# EAGLE board QRD1114_lista (EAGLE 9.0.1)
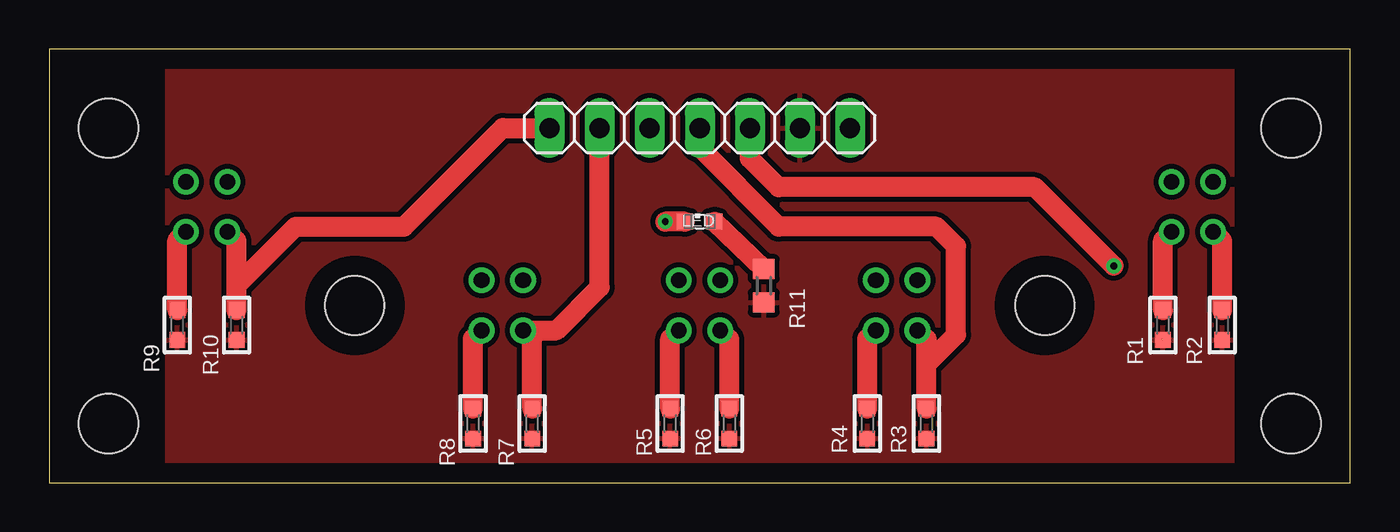
[diagram p0: board, top side]
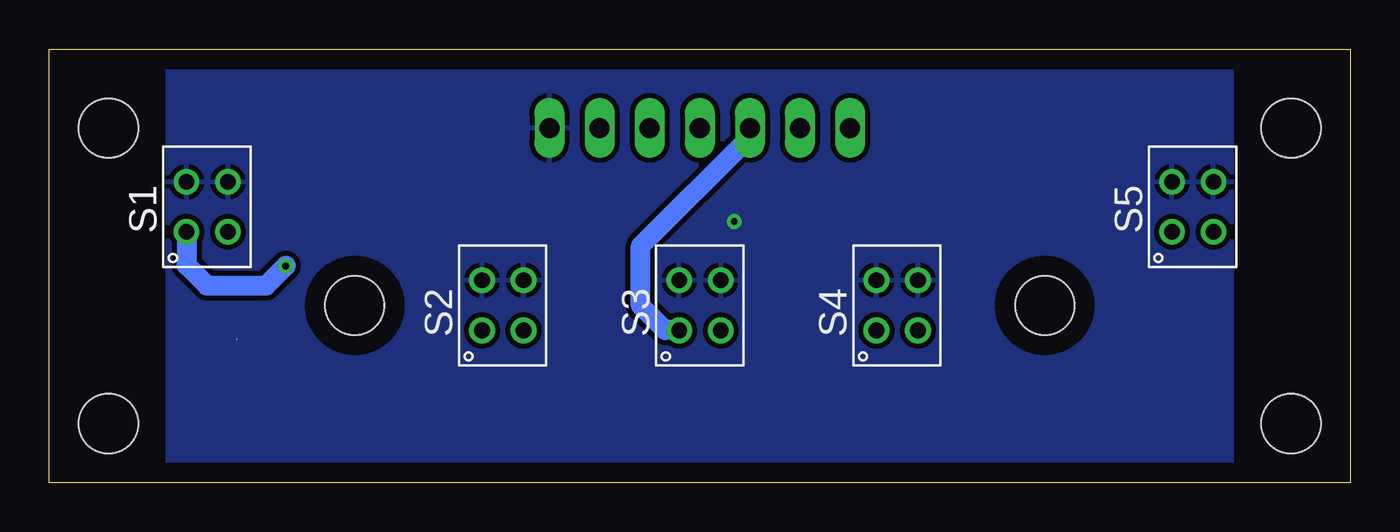
[diagram p1: board, bottom side, seen from below]

Size 66 x 22 mm. Coordinates in mm from the lower left corner, seen from the top.
Outline: 0,0 66,0 66,22 0,22 0,0
Copper layers (1*16): Top 0.035mm / dielectric 1.5mm / Bottom 0.035mm
Design rules "default": minimum track width 6mil, minimum drill 0.35mm, track to track 6mil, track to pad 6mil, pad to pad 6mil, via to via 6mil, smd to smd 6mil, copper to edge 40mil, drill to drill 6mil, minimum pad ring 10mil, minimum via ring 8mil, stop-mask expansion 4mil, vias tented up to drill 0mil, thermal gap 10mil
Net classes: 0 default: width 0.254 mm, drill 0.254 mm, clearance 0.254 mm
Holes 3 mm at 3,18 3,3 63,18 63,3 50.5,9 15.5,9

## Footprints (pad centres in the part's own frame; a part is rotated, then mirrored left to right if it is on the bottom)
1X07 = drill 1.016 long: 1 -7.62,0; 2 -5.08,0; 3 -2.54,0; 4 0,0; 5 2.54,0; 6 5.08,0; 7 7.62,0
SML0603 = smd 0.8 x 0.8: A 0.75,0; C -0.75,0
R0603 = smd 0.8 x 0.8: 1 -0.762,0; 2 0.762,0
R0603' = smd 1 x 1.1: 1 -0.85,0; 2 0.85,0
QRD1114 = drill 0.8: P$1 -1.041,-1.27; P$2 -1.041,1.27; P$3 1.067,-1.27; P$4 1.067,1.27

## Placement (x,y rotation side)
JP1  [1X07]  33,18 180 top
LED  [SML0603]  33,13.25 0 top
R1  330 Ω  [R0603]  56.5,8 90 top
R2  10 kΩ  [R0603]  59.5,8 90 top
R3  10 kΩ  [R0603]  44.5,3 90 top
R4  330 Ω  [R0603]  41.5,3 90 top
R5  330 Ω  [R0603]  31.5,3 270 top
R6  10 kΩ  [R0603]  34.5,3 270 top
R7  10 kΩ  [R0603]  24.5,3 270 top
R8  330 Ω  [R0603]  21.5,3 270 top
R9  330 Ω  [R0603]  6.5,8 270 top
R10  10 kΩ  [R0603]  9.5,8 270 top
R11  330  [R0603']  36.25,10 270 top
S1  QRD1114  [QRD1114]  58,14 0 bottom
S2  QRD1114  [QRD1114]  43,9 0 bottom
S3  QRD1114  [QRD1114]  33,9 0 bottom
S4  QRD1114  [QRD1114]  23,9 0 bottom
S5  QRD1114  [QRD1114]  8,14 0 bottom

## Library data of the parts
JP1 = pinhead
LED = led
R1 R4 R5 R8 R9 = rc-master-smd; MF: VISHAY; MPN: CRCW0805330RFKEA; OC_FARNELL: 1469918
R2 R3 R6 R7 R10 = rc-master-smd; OC_FARNELL: unknown
R11 = resistor
S1-S4 = QRD1114; AVAILABILITY: Good; DESCRIPTION: QRD1114 Series 30 V 50 mA Phototransistor Reflective Object Sensor; MF: ON SEMICONDUCTOR; MP: QRD1114; MPN: QRD1114; OC_FARNELL: 1467858; PACKAGE: Radial-4 ON Semiconductor; PRICE: 0.97 USD
S5 = QRD1114; AVAILABILITY: Good; DESCRIPTION: QRD1114 Series 30 V 50 mA Phototransistor Reflective Object Sensor; MF: ON Semiconductor; MP: QRD1114; MPN: QRD1114; OC_FARNELL: 1467858; PACKAGE: Radial-4 ON Semiconductor; PRICE: 0.97 USD

## Nets
+5V: JP1.2 R1.1 R2.1 R3.1 R4.1 R5.2 R6.2 R7.2 R8.2 R9.2 R10.2 R11.2
GND: JP1.1 LED.C S1.P$2 S1.P$4 S2.P$2 S2.P$4 S3.P$2 S3.P$4 S4.P$2 S4.P$4 S5.P$2 S5.P$4
N$1: R5.1 S3.P$3
N$2: R1.2 S1.P$3
N$3: LED.A R11.1
N$4: R8.1 S4.P$3
N$5: R4.2 S2.P$3
N$7: R9.1 S5.P$3
S1: JP1.3 R2.2 S1.P$1
S2: JP1.4 R3.2 S2.P$1
S3: JP1.5 R6.1 S3.P$1
S4: JP1.6 R7.1 S4.P$1
S5: JP1.7 R10.1 S5.P$1

## Tracks (layer width: path | path; a pad name or v marks a point on that pad's centre or on a via)
+5V  (1 unrouted)
  Top 0.254: 56.41,7.38 56.46,7.3
  pour Top: 6,0 6,22 60,22 60,0
GND  (via drill 0.35)
  Top 1.016: LED.C v31.25,13.25
  pour Bottom: 60,22 60,0 6,0 6,22
N$1
  Top 1.016: R5.1 31.5,7.3 S3.P$3
N$2
  Top 1.016: R1.2 56.5,12.3 S1.P$3
N$3
  Top 1.016: R11.1 LED.A
N$4
  Top 1.016: R8.1 21.5,7.3 S4.P$3
N$5
  Top 1.016: R4.2 41.5,7.3 S2.P$3
N$7
  Top 1.016: R9.1 6.5,12.3 S5.P$3
S1  (via drill 0.35)
  Top 1.016: R2.2 59.5,12.27 S1.P$1 | v54,11 50,15 37,15 35.54,16.46 JP1.3
  Bottom 1.016: S1.P$1 59.04,11.04 58,10 55,10 v54,11
S2
  Top 1.016: R3.2 44.5,6 | 44.5,6 44.5,7.27 S2.P$1 | 44.5,6 46,7.5 46,12 45,13 37,13 33,17 JP1.4
S3
  Top 1.016: R6.1 34.5,7.27 S3.P$1
  Bottom 1.016: S3.P$1 34.06,7.75 34.75,7.75 36,9 36,12 30.46,17.54 JP1.5
S4
  Top 1.016: R7.1 24.5,7.27 S4.P$1 25.73,7.73 27.92,9.92 JP1.6
S5
  Top 1.016: R10.1 9.5,10 | 9.5,10 9.5,12.27 S5.P$1 | 9.5,10 12.5,13 18,13 23,18 JP1.7

## Text on the board
bTest: ° | ° | ° | ° | °
tDocu: 5v | S5 | S4 | S3 | S2 | S1 | GND
bDocu: QRD-bar-0,1_version